# Altium PCB Sensado.PcbDoc
Units mm, origin at the board's own origin, x right, y up, seen from the top; angles counter-clockwise.
Board outline 73.95 x 49.8 mm, 2 copper layers (Top Layer, Bottom Layer); 37 components, 26 nets, 107 pads, 12 vias.
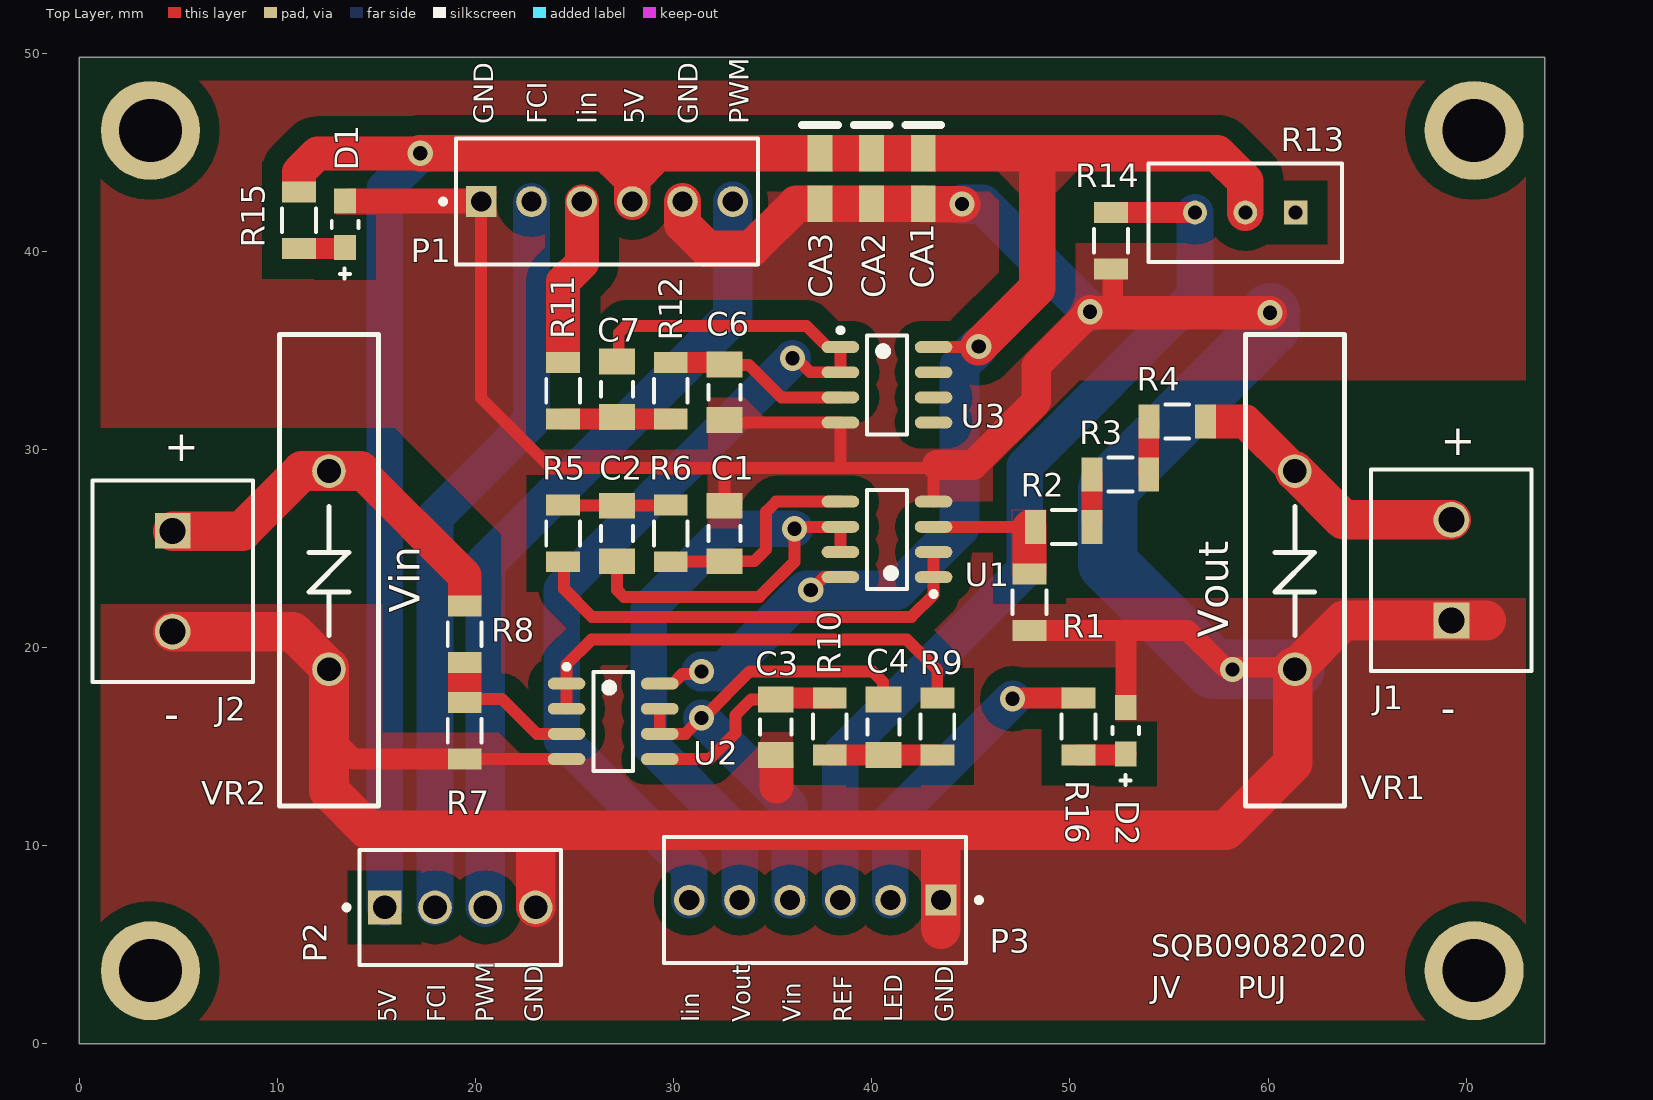
[diagram p0: Top Layer view]
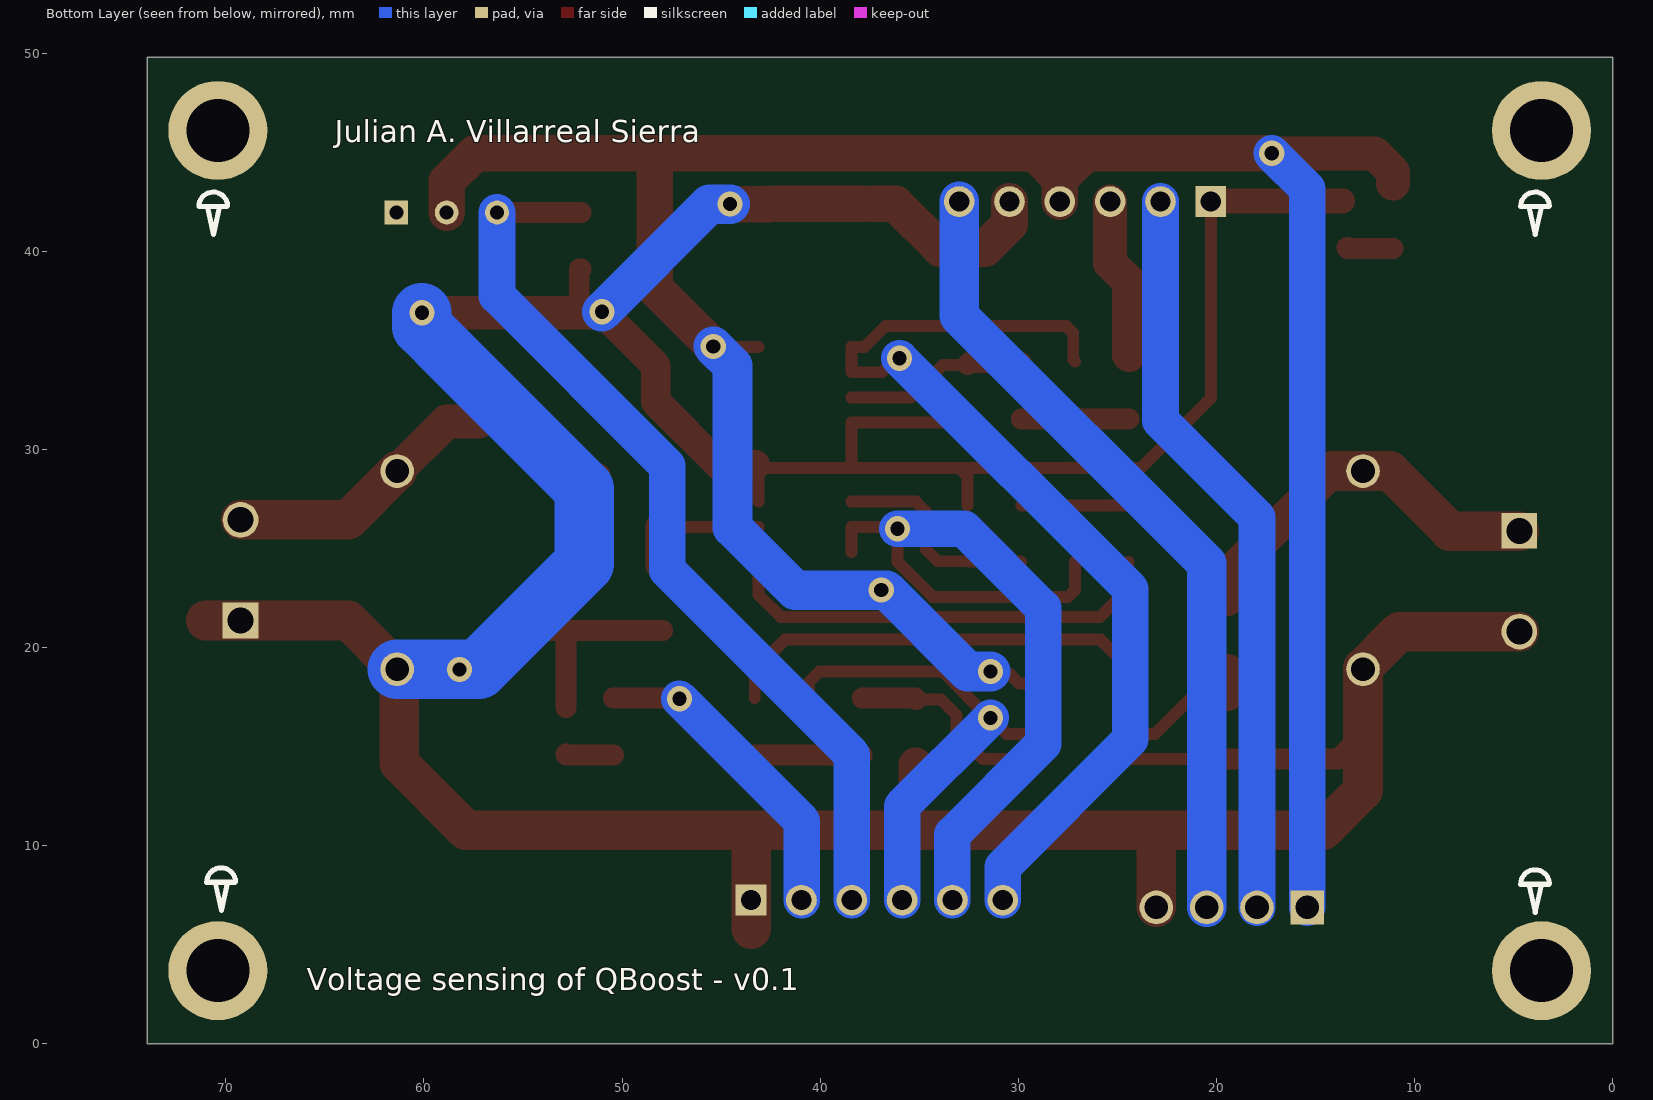
[diagram p1: Bottom Layer view, seen from below]
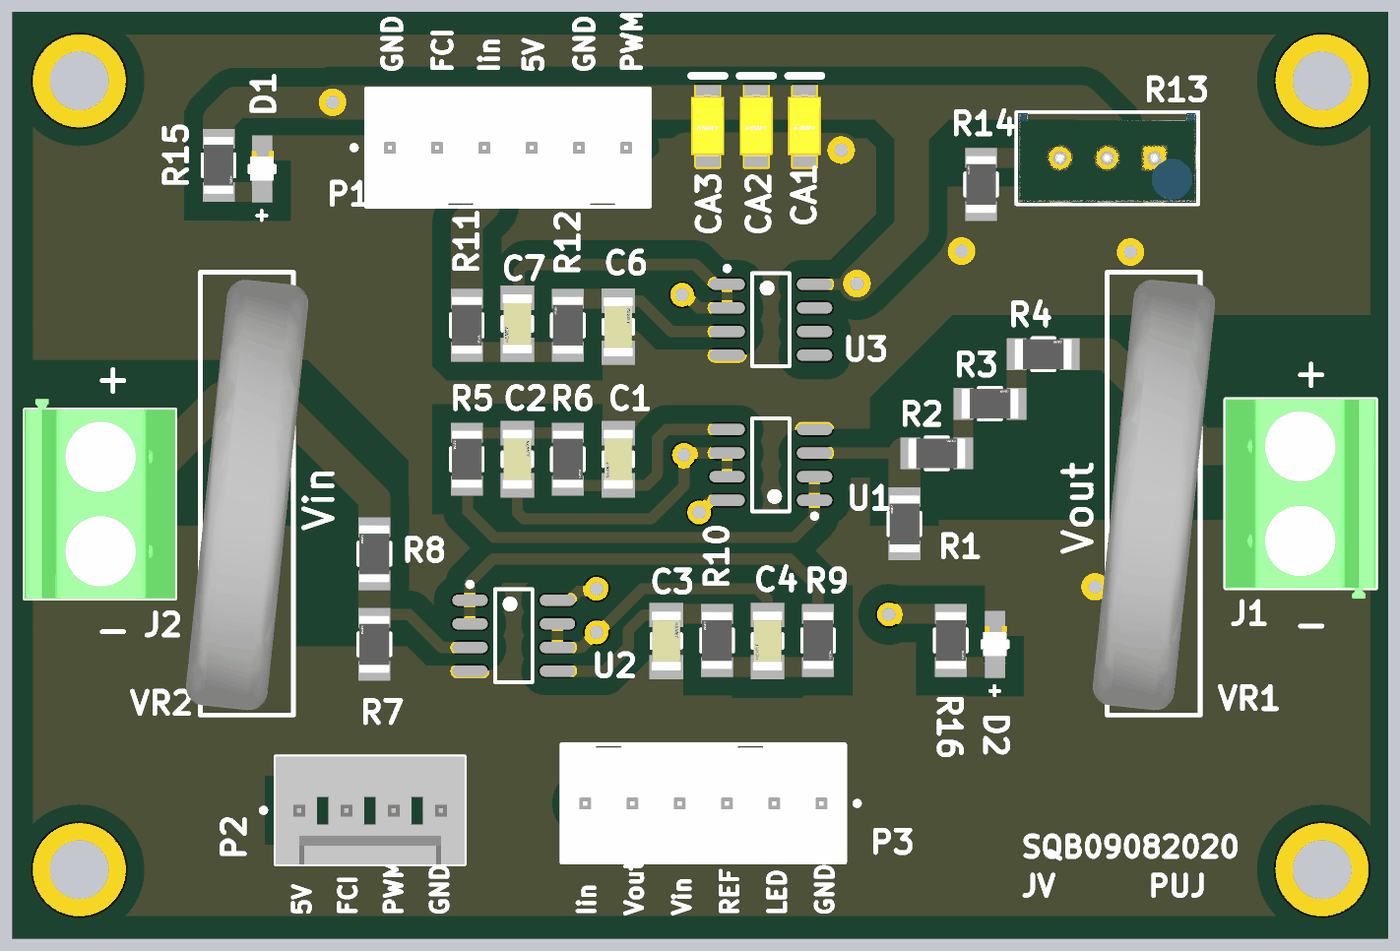
[diagram p2: 3D render of the assembled board from above, using the file's embedded part models]

## Layer stack, top to bottom
Top Solder: solder mask 0.0102, Solder Resist, Dk 3.5
Top Layer: signal copper 0.0356
Dielectric 1: dielectric 0.32, FR-4, Dk 4.8
Bottom Layer: signal copper 0.0356
Bottom Solder: solder mask 0.0102, Solder Resist, Dk 3.5

## Board outline
0,0 0,49.8 73.95,49.8 73.95,0

## Design rules (kind name [scope] priority, off if disabled: settings)
Clearance [All] p1: gap=0.3 ignorepadtopadclearanceinfootprint=FALSE
Height [All] p1: minheight=0 maxheight=35 prefheight=12.7
HoleSize [All] p1: absolutevalues=TRUE maxlimit=5 minlimit=0.025 maxpercent=80.000 minpercent=20.000
PolygonConnect [All] p1: connectstyle=Direct reliefconductorwidth=0.254 reliefentries=2 polygonreliefangle="90 Angle" airgapwidth=0.5
RoutingVias [All] p1: holewidth=0.711 width=1.27 viastyle="Through Hole" minholewidth=0.711 minwidth=1.27 maxholewidth=0.711 maxwidth=1.27
SolderMaskExpansion [All] p1: expansion=0.102
Width Width_1.712mm [All] p1 off: maxlimit=3 minlimit=0.254 preferedwidth=1.712
Width Width_1.85mm [All] p2 off: maxlimit=3 minlimit=0.254 preferedwidth=1.85
Width Width_2mm [All] p3: maxlimit=3 minlimit=0.254 preferedwidth=2
Width Width_1.058mm [All] p4 off: maxlimit=3 minlimit=0.254 preferedwidth=1.058
Width Width_1.305mm [All] p5 off: maxlimit=3 minlimit=0.254 preferedwidth=1.305
Width Width_0.6 [All] p6 off: maxlimit=4 minlimit=0.254 preferedwidth=0.6
28 further rules are at their usual default settings.

## Classes and differential pairs
component class Sensado: C1 C2 C3 C4 C6 C7 CA1 CA3 D1 D2 J1 J2 P1 P2 R1 R2 R3 R4 R5 R6 R7 R8 R9 R10 R11 R12 R13 R14 U1 U2 U3 VR1 VR2

## Components (designator, comment, footprint, x,y, rotation, side; value= is the part's Value field where it differs from the comment)
C1 "C1206C471J5GACTU" FP-C1206C-EB-IPC_B 32.57,25.76 r90 top value="470 pF"
C2 "C1206C471J5GACTU" FP-C1206C-EB-IPC_B 27.143,25.76 r270 top value="470 pF"
C3 "C1206C471J5GACTU" FP-C1206C-EB-IPC_B 35.15,15.99 r270 top value="470 pF"
C4 "C1206C471J5GACTU" FP-C1206C-EB-IPC_B 40.593,15.99 r90 top value="470 pF"
C6 "C1206C471J5GACTU" FP-C1206C-EB-IPC_B 32.57,32.881 r270 top value="470 pF"
C7 "C1206C471J5GACTU" FP-C1206C-EB-IPC_B 27.143,33.04 r90 top value="470 pF"
CA1 "T491A225K016AT" KEMT-T491-A_N 42.594,43.67 r270 top
CA2 "T491A225K016AT" KEMT-T491-A_N 39.99,43.67 r270 top
CA3 "T491A225K016AT" KEMT-T491-A_N 37.386,43.67 r270 top
D1 "KP-2012SYCK" FP-KP-2012SYCK-MFG 13.425,41.36 r90 top
D2 "KP-2012SYCK" FP-KP-2012SYCK-MFG 52.82,15.81 r90 top
J1 "1729128" PHOE-1729128-2_V 69.25,23.91 r90 top
J2 "1729128" PHOE-1729128-2_V 4.72,23.35 r270 top
P1 "22-23-2061" MOLX-22-23-2061_V 26.64,42.51 r0 top
P2 "22-27-2041" MOLX-22-27-2041_V 19.23,6.89 r180 top
P3 "22-23-2061" MOLX-22-23-2061_V 37.14,7.26 r180 top
R1 "RC1206JR-51" FP-RC1206-IPC_B 47.95,22.283 r90 top value=0O
R2 "RC1206JR-51" FP-RC1206-IPC_B 49.69,26.077 r0 top value=0O
R3 "RC1206JR-51" FP-RC1206-IPC_B 52.55,28.744 r0 top value=0O
R4 "RC1206JR-51" FP-RC1206-IPC_B 55.412,31.41 r0 top value=0O
R5 "RC1206JR-51" FP-RC1206-IPC_B 24.43,25.76 r90 top value=0O
R6 "RC1206JR-51" FP-RC1206-IPC_B 29.857,25.76 r270 top value=0O
R7 "RC1206JR-51" FP-RC1206-IPC_B 19.46,15.81 r90 top value=0O
R8 "RC1206JR-51" FP-RC1206-IPC_B 19.46,20.676 r90 top value=0O
R9 "RC1206JR-51" FP-RC1206-IPC_B 43.307,16.02 r270 top value=0O
R10 "RC1206JR-51" FP-RC1206-IPC_B 37.88,16.02 r90 top value=0O
R11 "RC1206JR-51" FP-RC1206-IPC_B 24.43,32.96 r270 top value=0O
R12 "RC1206JR-51" FP-RC1206-IPC_B 29.857,32.96 r90 top value=0O
R13 "3296W-1-103RLF" FP-3296W-MFG 58.85,41.95 r90 top
R14 "RC1206JR-51" FP-RC1206-IPC_B 52.07,40.53 r90 top value=0O
R15 "RC1206JR-51" FP-RC1206-IPC_B 11.09,41.56 r270 top value=0O
R16 "RC1206JR-51" FP-RC1206-IPC_B 50.44,16.02 r270 top value=0O
U1 "MCP6072-E/SN" SOIC-SN8_L 40.77,25.46 r180 top
U2 "MCP6072-E/SN" SOIC-SN8_L 26.95,16.28 r0 top
U3 "MCP6072-E/SN" SOIC-SN8_L 40.77,33.26 r0 top
VR1 "mov-20d241k" "Axial 10MM" 61.35,28.91 r270 top
VR2 "mov-20d241k" "Axial 10MM" 12.61,28.91 r270 top

## Footprints (in the part's own frame and the unit in brackets; to place one, negate y for a bottom-side part, rotate by r counter-clockwise, add the part's x,y. Pads: shape width x height; smd on the part's side, far side on the other; paste and mask are expansions set on the pad)
"Axial 10MM" [mm]
  round 1.7 hole 1.2: 1(0,0) 2(10,0)
  silkscreen extent -6.9,-2.5 16.9,2.5, body extent -6.6,-3.38 16.74,3.4, height 26.01
FP-3296W-MFG [mm]
  rect 1.2x1.2 hole 0.7 paste-1000 mask+0: 1(0.005,-2.54)
  round 1.2 hole 0.7 paste-1000 mask+0: 2(0.005,0) 3(0.005,2.54)
  silkscreen extent -2.48,-4.89 2.48,4.89, body extent -2.58,-4.99 2.58,4.99, height 0.25
FP-C1206C-EB-IPC_B [mm]
  rect 1.305x1.806 smd paste+0 mask+0: 1(-1.401,0) 2(1.401,0)
  silkscreen extent -0.37,-0.8 0.37,0.8, body extent -2.3,-1.15 2.3,1.15, height 0.25
FP-KP-2012SYCK-MFG [mm]
  rect 1.25x1.1 smd paste+0 mask+0: 1(-1.175,0) 2(1.175,0)
  silkscreen extent -2.74,-0.67 0.18,0.67, body extent -1.9,-0.77 1.9,0.77, height 0.25
FP-RC1206-IPC_B [mm]
  rect 1.058x1.712 smd paste+0 mask+0: 1(-1.427,0) 2(1.427,0)
  silkscreen extent -0.6,-0.86 0.6,0.86, body extent -2.21,-1.11 2.21,1.11, height 0.25
KEMT-T491-A_N [mm] "Molded Capacitor, 2-Leads, Body 3.40x1.80mm, IPC Medium Density"
  rect 1.85x1.25 smd: 1(-1.275,0) 2(1.275,0)
  silkscreen extent -2.7,-0.9 -2.7,0.9, body extent -1.7,-0.91 1.7,0.89, height 1.78
MOLX-22-23-2061_V [mm] "THD, 6-Leads, Body 15.24x6.35mm, Pitch 2.54mm"
  rect 1.55x1.55 hole 1.02: 1(-6.35,0)
  round 1.55 hole 1.02: 2(-3.81,0) 3(-1.27,0) 4(1.27,0) 5(3.81,0) 6(6.35,0)
  silkscreen extent -8.39,-3.17 7.62,3.17, body extent -7.54,-3.25 7.54,3.1, height 10.67
MOLX-22-27-2041_V [mm] "CONN, 4-Leads, Body 10.16x5.8mm, Pitch 2.54mm"
  rect 1.7x1.7 hole 1.19: 1(3.81,0)
  round 1.7 hole 1.19: 2(1.27,0) 3(-1.27,0) 4(-3.81,0)
  silkscreen extent -5.08,-2.9 5.85,2.9, body extent -5.08,-2.9 5.08,2.9, height 11.7
PHOE-1729128-2_V [mm] "Receptacle, 2-Leads, Body 8.1x10.16mm, Pitch 5.08mm"
  rect 1.8x1.8 hole 1.3: 1(-2.54,0)
  round 1.8 hole 1.3: 2(2.54,0)
  silkscreen extent -5.08,-4.05 5.08,4.05, body extent -5.65,-4.05 5.08,4.05, height 10.01
SOIC-SN8_L [mm] "SOIC, 8-Leads, Body 4.9x3.9mm, Pitch 1.27mm, IPC High Density"
  oval 1.9x0.6 smd: 1(-2.35,1.905) 2(-2.35,0.635) 3(-2.35,-0.635) 4(-2.35,-1.905) 5(2.35,-1.905) 6(2.35,-0.635) 7(2.35,0.635) 8(2.35,1.905)
  silkscreen extent -2.48,-2.5 1,2.88, body extent -2,-2.5 2,2.5, height 1.75

## Part data
C1 C2 C3 C4 C6 C7: library part CMP-03020-008367-1, "1206 C 470pF Ceramic Multilayer Capacitor; 50 V; +125degC; C0G Dielectric; +/-5%", Capacitance="470 pF", Manufacturer=KEMET, Package=C1206C-EB, Temperature="-55°C to +150°C", Temperature Characteristic=C0G, Temperature Coefficient=15%, Temperature Range High=+150°C, Temperature Range Low=-55°C, Tolerance=0.05, Voltage Rating="50 V", Automotive=Yes, Automotive Grade="Grade 0", Category=Cap, ComponentLink2Description=Datasheet, ComponentLink2URL=https://content.kemet.com/datasheets/KEM_C1007_X8R_ULTRA_150C_SMD.pdf, Device Class L1="Passive Components", Device Class L2=Capacitors, Device Class L3="Ceramic Capacitors", Digikey Description="1206 C 470pF Ceramic Multilayer Capacitor; 50 V; +125degC; C0G Dielectric; +/-5%", Height=0.88mm, Ipc Land Pattern Name=CAPC320160X78, Lead Free=Yes, Manufacturer Part Number=C1206C471J5GACTU, Material=Ceramic, Mouser Description="1206 C 470pF Ceramic Multilayer Capacitor; 50 V; +125degC; C0G Dielectric; +/-5%", Octopart=https://octopart.com/c1206c471j5gactu-kemet-123947, RoHS=TRUE
CA1 CA2 CA3: library part CMP-2000-07187-1, "Tantalum Capacitor, 2.2 uF, +/- 10%, 16 V, -55 to 125 degC, 2-Pin SMD, RoHS, Tape and Reel", Capacitance=2200000pF, Case Code=A, Case Style=Molded, Manufacturer=Kemet, Operating Temp Range=-55Cto125C, Package / Case=3216-18, Package Description="2-Pin Surface Mount Device, Body 3.2 x 1.6 mm", Package Reference=T491-A, Tolerance (+ or -)=10%, Voltage=16VDC, Construction=SMTChip, Datasheet URL=http://capacitoredge.kemet.com/capedge2/DataSheet/Datasheet-T491A225K016AT.pdf?pn=T491A225K016AT, Datasheet Version=10/2016, DCL=0.4uA, DF=6%, ESR=6ohm, Failure Rate=NotRequired, Insulation=NotRequired, Lead Spacing (nom)=NotRequiredmm, Length W/Weld=NotRequiredmm, Length W/Weld (max)=NotRequiredmm, Manufacturer URL=http://www.kemet.com/, Mounting Style=SurfaceMount, Mounting Technology=SurfaceMount, Packaging=TapeandReel, Polarity=Polar, Product Depth (mm)=1.6mm, Product Diameter (mm)=NotRequiredmm, Product Height (mm)=1.6mm, Product Length (mm)=3.2mm, Rad Hardened=No, Seal=NotRequired, Seated Plane Height=NotRequiredmm, Wire Form=NotRequired
D1 D2: library part CMP-44529-000002-1, "2.0x1.25mm SMD CHIP LED LAMP", Colour=Yellow, Forward Current=20mA, Forward Voltage=2V, Manufacturer=KINGBRIGHT, Package=0, Power Dissipation=75mW, Reverse Voltage=5V, Temperature="-40°C to +85°C", Temperature Range High=+85°C, Temperature Range Low=-40°C, Automotive=No, Category=Diode, ComponentLink2Description=Datasheet, ComponentLink2URL=http://www.farnell.com/datasheets/2045820.pdf, Device Class L1=Optoelectronics, Device Class L2=LEDs, Device Class L3=unset, Height=1.1mm, Lead Free=Yes, Led Orientation="Top View", Luminous Intensity=150mcd, Manufacturer Part Number=KP-2012SYCK, Octopart=https://octopart.com/kp-2012syck-kingbright-5387420, Peak Emmision Wavelength=590nm, RoHS=TRUE, Viewing Angle=120°, Wavelength=590nm
J1 J2: library part CMP-2000-05815-1, "PCB Terminal Block, 13.5 A, 400 V, 2-Pin THD, RoHS, Bulk", Current rating=13500mA, Manufacturer="Phoenix Contact", Package Description="2-Pin Through Hole Device, Body 8.1 x 10.16 mm, Pitch 5.08 mm", Package Reference=1729128-2, Package Version=03/2015, Voltage Rating=400V, Datasheet URL=https://datasheet.ciiva.com/16046/1729128-16046181.pdf, Datasheet Version=12/2013, Manufacturer URL=http://www.phoenixcontact.com/, Mounting Technology=ThroughHole, No. of Positions=2, No. of Rows=1, Orientation=Horizontal, Package URL=https://www.phoenixcontact.com/online/portal/pi/pxc/product_detail_page/!ut/p/b1/3VdJjqNKFDxLH8AFycySyWY2ozFsEPOMMQaDOX1XedGL_1Vdm5YXJleknhSKeBkvI6EA8ncAo3AYoDhBQGco6KN7VURTdemj9us_IEKEZo_YHiPAEWEFmDGOHMORkqKYCORBZxgL7ZoaZYcbFFUZ3fqxSY6GOuxydWUuHqz1ynmMFygu583Bob0Ewr6Sd_l-5m-kAueHiB0jpRwZwe58wwtkpxtMYd_LmGcDRU02dRNEyWt6Y2ti5pSyJ_reIkzIulrqApdnbT11V5jnCKbYNCvhEM1MCpPByat_X379-iThf08CI5GfOPqfBeS3BRoBOdD55AKVv0iLwCMq-2BrzXWSGRH7pUGD9uwXQjiph3xL0DKQwdGa0JImiIOmBNOestqgwTHSSs2oOep-78apyXQBvNi8ZLaFjvjWvcaUEBu0MC6Wbe-d6mB0FAebo2lUWinqYaZs5DAYzV0RP9yitUjnGJ0iI9xhZkT42OCQNUJJhkgWINNQLP2JFP6OpMg3JCVg70jqHT0lvKOnhHf0lPuOnnLf0VPuWx6_dxwUIvwk5WMkT0kLL1mh61l2yZVSzG3pYV_bqo-mj6uMKwKwdnnW8Jh5RTOJzMOA5c-eJDaZQw4mTMPH02PvS_ZAqNVjVTo2WyYLkwH_KU1mmmG5kjRhDqPXLwwVHvVOjCM60-fpXvTDfMGW1PVFVS1r4e4yVDk4ZdNbkUHvqPqQSeian4UD39fNKmachqdJ1NJbyk8rXT9mXTvPk3oE5meulKGgiruPJek-4I9hTT6G8ZLOyRSm2RRVbThERQad5OS28hdt4YW4vG0stgYYzsWsK4_7y6DZMjJSCqri1kyiZR5vD7pwIrNR7QwPHTcLTI5qT7eRlpHrdGiupYlqQDJ7zy_CND8fWWBoLRXxk1RVcXiBQwbTD4Xi7KL-FuO94t9xaqweXzH, Packing=Bulk, PartNumber=1729128, Pitch=5.08mm, RoHS=TRUE
P1 P3: library part CMP-2000-05536-1, "Male Header, Pitch 2.54 mm, 1 x 6 Position, Height 10.67 mm, Tail Length 3.56 mm, 0 to 70 degC, RoHS, Bulk", Current rating=4A, Manufacturer=Molex, Package Description="Male Header, Pitch 2.54 mm, 1 x 6 Position, Height 10.67 mm, Tail Length 3.56 mm", Voltage Rating=250V, =002223206122-23-2061-PBA-6373-06A102, Brand=Molex, Contact material=Brass, Contact Plating=Tin, Datasheet URL=https://datasheet.ciiva.com/19460/232303-19460895.pdf, Datasheet Version="Rev. P, 09/2001", Factory Pack Quantity=1000, Housing material=Nylon, Manufacturer URL=http://www.molex.com/, Mounting Angle=Vertical, Mounting Style=ThroughHole, Mounting Technology=ThroughHole, Number of Positions=6, Number of Positions / Contacts=6, Number of Rows=1, Package Reference=22-23-2061, Packaging=Bulk, Pitch=2.54mm, Product Category=.100K.K.Connectors, Product Type=Headers, RoHS=Details, Series=6373, Termination Style=ThroughHole, Tradename=KK, Type=PinStrip
P2: library part CMP-2000-05243-1, "Male Header, Pitch 2.54 mm, 1 x 4 Position, Height 11.7 mm, Tail Length 3.56 mm, RoHS, Bulk", Current rating=4A, Manufacturer=Molex, Operating temperature=0degCto+75degC, Voltage Rating=250V, Contact material=Tinplatedbrass, Datasheet URL=http://www.molex.com/pdm_docs/sd/022272041_sd.pdf, Datasheet Version="Rev. F, 06/2009", Housing material=Nylon(UL94V-0), Manufacturer URL=http://www.molex.com/
R1 R2 R3 R4 R5 R6 R7 R8 R9 R10 R11 R12 R14 R15 R16: library part CMP-03412-007570-1, "RES SMD 51 OHM  1/4W 1206", Manufacturer=YAGEO, Manufacturer Part Number=RC1206JR-070RL, Package=RC1206, Power Rating=0.25W, Resistance=0O, Temperature="-55°C to +155°C", Temperature Coefficient=300ppm/°C, Temperature Range High=+155°C, Temperature Range Low=-55°C, Tolerance=5%, Voltage Rating=200V, Automotive=No, Category=Res, ComponentLink2Description=Datasheet, ComponentLink2URL=https://www.yageo.com/upload/media/product/productsearch/datasheet/rchip/PYu-RC_Group_51_RoHS_L_10.pdf, Composition="Thick Film", Device Class L1="Passive Components", Device Class L2=Resistors, Device Class L3="Chip SMD Resistors", Digikey Description="RES SMD 0 OHM JUMPER 1/4W 1206", Footprint Url=https://www.yageo.com/upload/website/yageo_PYu-R_Mount_10_19050818_343.pdf, Height=0.65mm, Ipc Land Pattern Name=RESC310160X55, Lead Free=Yes, Mouser Description="Resistor: thick film; SMD; 1206; 0O; 0.25W; ±5%; -55÷155°C", Octopart=https://octopart.com/rc1206jr-070rl-yageo-40025601, RoHS=TRUE, Series=RC
R13: library part CMP-07234-000024-1, "TRIMMER 10K OHM 0.5W PC PIN TOP", Max Operating Temperature=125°C, Max Power Dissipation=500mW, Min Operating Temperature=-55°C, Package Quantity=1, Resistance=10kR, Temperature Coefficient=100ppm/°C, Tolerance=10%, Composition=Cermet, Contact Plating=Tin, Depth=4.83mm, Height=0.395inch, Length=9.53mm, Military Standard=Not, Mount="Through Hole", Number of Turns=25, Packaging="Tape and Reel", Power Rating=500mW, Radiation Hardening=No, REACH SVHC="No SVHC", Taper=Linear, Termination=Pin, Weight=0.03oz, Width=0.19inch
U1 U2 U3: library part CMP-0187-00342-2, "110 μA, High Precision Dual Op Amp, 8-Pin SOIC, Extended Temperature", Code_IPC=SOIC127P600-8, Code_JEDEC=MS-012, ComponentLink1Description="Manufacturer URL", ComponentLink1URL=http://www.microchip.com/, ComponentLink2Description=Datasheet, ComponentLink2URL=http://ww1.microchip.com/downloads/en/DeviceDoc/22142_B_MCP6071.pdf, ComponentLink3Description="Package Specification", ComponentLink3URL=http://www.microchip.com/stellent/groups/techpub_sg/documents/packagingspec/en012702.pdf, DatasheetVersion="revB, Dec-2010", PackageDescription="8-Lead Plastic Small Outline (SN) - Narrow, 3.90mm Body [SOIC]", PackageReference=SOIC-SN8, PackageVersion="revBB, Aug-2009", RevisionNote="URLs added. DatasheetVersion updated."
VR1 VR2: "Varistor de oxido de metal. / Voltaje AC (RMS): 150V. / Voltaje DC: 200V."

## Free pads (board coordinates)
  round 5 hole 3.175: 29(3.6,3.7) 29(3.6,46.1) 29(70.4,3.7) 29(70.4,46.1)

## Via types
v1: diameter 1.27, hole 0.711, Top Layer to Bottom Layer, 12 vias

## Nets (pads, with @x,y where several pads share a name; then routed paths per layer and width w, separated by ;. In a path a pad name is that pad's centre, name@x,y a point inside that pad or via, vN(x,y) a via of type N, cw(c..) or ccw(c..) an arc to the next point about the centre after c; other vN are vias at no path point)
GND: C1.2 C3.2 C6.2 CA1.2 CA2.2 CA3.2 D1.2 D2.2 J1.1 J2.2 P1.1 P1.5 P2.4 P3.1 R1.1 R7.1 R14.1 U1.4 U2.4 U3.4 VR1.2 VR2.2 | length 250.4
  Top Layer w0.6: R7.1 19.468,14.375 U2.4 ; P1.1@20.14,42.36 20.29,42.21 20.29,32.59 23.82,29.06 32.97,29.06 ; C1.2 32.57,28.66 32.97,29.06 ; C6.2 32.695,31.355 U3.4 38.42,29.08 38.4,29.06 ; U1.4 43.12,29.06 ; 43.28,29.22 43.12,29.06 ; 32.97,29.06 38.4,29.06 ; 38.4,29.06 43.12,29.06
  Top Layer w1.058: 12.61,15.61 13.837,14.383 R7.1 ; P1.1@20.044,42.535 20.14,42.439 P1.1@20.14,42.36 ; R1.1 52.77,20.856 ; R14.1 52.16,39.103 52.16,37.1 ; D2.2 52.82,20.806 52.77,20.856 ; VR1.2 61.25,19.01 57.79,19.01 55.944,20.856 52.77,20.856
  Top Layer w1.25: D1.2@13.65,42.535 P1.1@20.044,42.535
  Top Layer w1.5: 43.28,29.22 45.11,29.22 48.3,32.41 48.3,34.23 v1(51.02,36.95)
  Top Layer w1.712: 35.197,13.003 C3.2@35.197,14.1 ; v1(51.02,36.95) 51.07,36.9 v1(60.1,36.9)
  Top Layer w1.85: P1.5 30.45,41.38 31.694,40.136 33.936,40.136 36.195,42.395 CA3.2 ; CA3.2@37.78,42.395 CA2.2 CA1.2@42.25,42.395 ; CA1.2 42.609,42.38 v1(44.55,42.38)
  Top Layer w2: J2.2@4.72,20.8 10.79,20.8 12.61,18.98 VR2.2 12.61,15.61 12.61,12.79 14.62,10.78 23.17,10.78 ; P2.4 23.04,10.65 23.17,10.78 ; 43.49,5.8 P3.1 43.49,10.59 43.68,10.78 ; VR1.2@61.25,19.01 61.25,14.17 57.86,10.78 43.68,10.78 ; VR1.2 63.81,21.37 J1.1 71,21.37 ; 23.17,10.78 43.68,10.78
  Bottom Layer w2: v1(44.55,42.38) 45.59,42.38 v1(51.02,36.95)
  Bottom Layer w3: v1(60.1,36.9) 60.1,36.2 58.62,34.72 51.91,28.01 51.91,24.24 57.24,18.91 VR1.2
  other v1: 58.2,18.9
NetC1_1: C1.1 R6.2 U1.5 | length 10.9
  Top Layer w0.6: R6.2 29.87,24.346 32.557,24.346 C1.1 ; C1.1 34.07,24.36 34.67,24.96 34.67,26.86 35.175,27.365 U1.5
NetC2_1: C2.1 R5.2 R6.1 | length 5.4
  Top Layer w0.6: R5.2 24.443,27.174 27.13,27.174 C2.1 27.156,27.174 29.843,27.174 R6.1
NetC2_2: C2.2 P3.5 U1.6 U1.7 | length 42.2
  Top Layer w0.6: C2.2 27.143,22.911 27.495,22.56 34.33,22.56 36.1,24.33 v1(36.1,26) 36.195,26.095 U1.6 U1.7
  Bottom Layer w1.85: P3.5 33.33,10.57 28.75,15.15 28.75,22.01 32.74,26 v1(36.1,26)
NetC3_1: C3.1 R10.2 U2.5 | length 10.4
  Top Layer w0.6: U2.5 31.805,14.375 33.12,15.69 33.12,16.59 33.921,17.391 C3.1
  Top Layer w1.058: C3.1 35.206,17.447 R10.2
NetC4_1: C4.1 R9.2 R10.1 | length 5.4
  Top Layer w1.058: R10.1 R9.2
NetC4_2: C4.2 P3.4 U2.6 U2.7 | length 26
  Top Layer w0.6: U2.7 U2.6 30.597,15.645 v1(31.41,16.458) 31.508,16.458 33.85,18.8 40.03,18.8 40.57,18.26 40.57,17.414 C4.2
  Bottom Layer w1.85: v1(31.41,16.458) 35.87,11.998 P3.4
NetC6_1: C6.1 R12.2 U3.3 | length 9.3
  Top Layer w0.6: C6.1 32.582,34.27 33.79,34.27 35.435,32.625 U3.3
  Top Layer w1.058: R12.2 32.465,34.387 C6.1
NetC7_1: C7.1 R11.2 R12.1 | length 5.5
  Top Layer w1.058: R11.2 27.037,31.533 C7.1 27.249,31.533 R12.1
NetC7_2: C7.2 P3.6 U3.1 U3.2 | length 52.1
  Top Layer w0.6: C7.2 27.23,34.528 27.23,35.873 27.581,36.225 36.71,36.225 37.77,35.165 U3.1 U3.2 36.886,33.895 36.181,34.6 v1(36,34.6)
  Bottom Layer w1.85: P3.6 30.79,8.94 24.35,15.38 24.35,22.95 v1(36,34.6)
NetCA1_1: CA1.1 CA2.1 CA3.1 P1.4 P2.1 R13.2 R15.1 U1.8 U2.8 U3.8 | length 137.2
  Top Layer w0.6: U2.8 29.95,18.185 30.433,18.668 31.282,18.668 v1(31.41,18.796) ; v1(36.92,22.9) 37.575,23.555 U1.8 ; U3.8 v1@45.135,35.165
  Top Layer w1.712: R15.1@11.09,43.42 11.09,44.01 12.025,44.945 v1(17.215,44.945)
  Top Layer w1.85: v1(17.215,44.945) 28.595,44.945 ; 26.965,44.585 27.91,43.64 ; P1.4 27.91,43.64 ; 28.015,43.785 28.96,44.73 ; CA3.1 28.595,44.945 ; CA3.1@37.72,44.945 CA2.1 CA1.1@42.28,44.945 ; CA1.1 48.35,44.945 ; v1@45.365,35.165 v1(45.4,35.2) 48.35,38.15 48.35,44.945 ; R13.2 58.85,43.53 57.435,44.945 48.35,44.945 ; 27.91,43.64 27.91,44.26 28.595,44.945
  Bottom Layer w1.85: P2.1 15.42,43.15 v1(17.215,44.945)
  Bottom Layer w2: v1(31.41,18.796) 32.556,18.796 36.66,22.9 v1(36.92,22.9) 41.27,22.9 44.43,26.06 44.43,34.23 v1(45.4,35.2)
NetD1_1: D1.1 R15.2 | length 2.4
  Top Layer w1.058: R15.2 13.404,40.133 13.425,40.154 D1.1
NetD2_1: D2.1 R16.2 | length 2.4
  Top Layer w1.058: R16.2 52.799,14.593 52.82,14.614 D2.1
NetJ1_2: J1.2 R4.2 VR1.1 | length 14.1
  Top Layer w1.712: R4.2@57.25,31.41 58.85,31.41 VR1.1
  Top Layer w2: VR1.1 63.81,26.45 J1.2
NetJ2_1: J2.1 R8.2 VR2.1 | length 19.4
  Top Layer w1.712: 14.18,28.91 19.46,23.63 R8.2@19.46,22.46
  Top Layer w2: J2.1@4.72,25.88 8.22,25.88 11.25,28.91 VR2.1 14.18,28.91
NetP1_2: P1.2 P2.2 | length 37.6
  Bottom Layer w1.85: P2.2 17.96,26.58 22.83,31.45 P1.2
NetP1_3: P1.3 R11.1 | length 8.1
  Top Layer w1.712: R11.1@24.43,34.77 24.43,38.472 25.37,39.412 P1.3
NetP1_6: P1.6 P2.3 | length 40.8
  Bottom Layer w2: P2.3 20.5,24.25 32.99,36.74 P1.6
NetP3_2: P3.2 R16.1 | length 16.1
  Top Layer w1.058: v1(47.11,17.42) 47.137,17.447 R16.1
  Bottom Layer w1.85: P3.2@40.93,7.26 40.93,11.24 v1(47.11,17.42)
NetP3_3: P3.3 R13.3 R14.2 | length 46.3
  Top Layer w1.058: R14.2@52.07,41.955 R13.3
  Bottom Layer w1.85: P3.3 38.41,14.6 47.72,23.91 47.72,29.17 56.31,37.76 R13.3
NetR1_2: R1.2 R2.1 U1.3 | length 6.7
  Top Layer w0.6: U1.3 R2.1@47.95,26.095
  Top Layer w1.712: R1.2@47.95,24.2 R2.1@47.95,26.095
NetR2_2: R2.2 R3.1 | length 2.3
  Top Layer w1.058: R2.2@51.123,26.42 R3.1
NetR3_2: R3.2 R4.1 | length 2.7
  Top Layer w1.058: R3.2 53.977,31.075 53.985,31.083 R4.1
NetR5_1: R5.1 U1.1 U1.2 | length 23.2
  Top Layer w0.6: R5.1 24.47,24.293 24.47,22.96 25.88,21.55 42,21.55 43.12,22.67 U1.1 U1.2
NetR7_2: R7.2 R8.1 U2.3 | length 7.3
  Top Layer w0.6: R7.2@19.16,17.41 21.33,17.41 23.095,15.645 U2.3
  Top Layer w1.712: R7.2@19.46,17.67 R8.1@19.46,18.83
NetR9_1: R9.1 U2.1 U2.2 | length 23.5
  Top Layer w0.6: U2.2 U2.1 24.6,19.15 25.86,20.41 41.773,20.41 43.307,18.876 R9.1
pads on no net: R13.1 U3.5 U3.6 U3.7
copper on no net: | length 1
  Bottom Layer w1.712: 69.771,46.729 70.4,46.1
  Bottom Layer w2: 70.4,3.7 70.5,3.7

## Polygon pours and split planes (outlines as drawn)
GND on Top Layer "Top Layer-GND" (solid, remove dead copper, pour order 4): 1.1,48.6 73,48.6 73,1.2 1.1,1.2
NetCA1_1 on Top Layer "Top Layer-NetCA1_1" (solid, pour order 2): 46.11,44.27 47.65,42.73 49.06,42.73 50.6,44.27
NetR1_2 on Top Layer "Top Layer-NetR1_2" (solid, pour order 0): 48.79,23.66 47.09,23.66 47.09,26.96 48.79,26.96
no net on Bottom Layer "Bottom Layer-No Net" (solid, pour order 8): 73,48.7

## Other copper
Top Layer:
  pour cut-out: 21.3,22.2 21.3,15.7 15.3,15.7 15.3,22.2
  pour cut-out: 1.1,31.1 15.9,31.1 21.3,25.7 21.3,22.2 1.1,22.2
  pour cut-out: 77.4,28.9
  pour cut-out: 73,33.5 50.5,33.5 46.1,29.1 46.1,22.5 73,22.5

## Silkscreen, mask and mechanical layers (free items; w line width, h text height)
Top Overlay:
  text "GND" at 20.9,46.4 h1 r90
  text "FCI" at 23.61,46.4 h1 r90
  text "Iin" at 26.11,46.4 h1 r90
  text "5V" at 28.5,46.4 h1 r90
  text "GND" at 31.23,46.4 h1 r90
  text "PWM" at 33.79,46.4 h1 r90
  text "+" at 68.7,29.7 h1.52
  text "+" at 4.3,29.4 h1.52
  text "Vin" at 17.2,21.77 h1.52 r90
  text "Vout" at 58,20.5 h1.52 r90
  text "-" at 68.7,16.2 h1.52
  text "-" at 4.3,15.9 h1.52
  text "SQB09082020" at 54.1,4.4 h1.1
  text "JV      PUJ" at 54.1,2.3 h1.1
  text "5V" at 16,1.1 h0.9 r90
  text "FCI" at 18.467,1.1 h0.9 r90
  text "PWM" at 20.933,1.1 h0.9 r90
  text "GND" at 23.4,1.1 h0.9 r90
  text "Iin" at 31.3,1.1 h0.9 r90
  text "Vout" at 33.86,1.1 h0.9 r90
  text "Vin" at 36.42,1.1 h0.9 r90
  text "REF" at 38.98,1.1 h0.9 r90
  text "LED" at 41.54,1.1 h0.9 r90
  text "GND" at 44.1,1.1 h0.9 r90
Bottom Overlay:
  lines w0.254: 3.2,8.087 cw(c3.93,8.06) 4.66,8.06 3.227,8.06 ; 3.2,42.287 cw(c3.93,42.26) 4.66,42.26 3.227,42.26 ; 3.61,8.047 3.92,6.638 4.229,8.047 ; 3.61,42.247 3.92,40.838 4.229,42.247 ; 69.5,8.187 cw(c70.23,8.16) 70.96,8.16 69.527,8.16 ; 69.9,42.287 cw(c70.63,42.26) 71.36,42.26 69.927,42.26 ; 69.91,8.147 70.22,6.738 70.529,8.147 ; 70.31,42.247 70.62,40.838 70.929,42.247
  text "Julian A. Villarreal Sierra" at 64.5,45.5 h1.1
  text "Voltage sensing of QBoost - v0.1" at 65.9,2.7 h1.1
Mechanical 1:
  the board outline again, w0.254